# Altium PCB stm32-synthesizer_Board.PcbDoc
Units mm, origin at the board's own origin, x right, y up, seen from the top; angles counter-clockwise.
Board outline 100 x 82.5 mm, 2 copper layers (Top Layer, Bottom Layer); 81 components, 66 nets, 294 pads, 211 vias.
Unrouted connection lines stored in the file: 1.
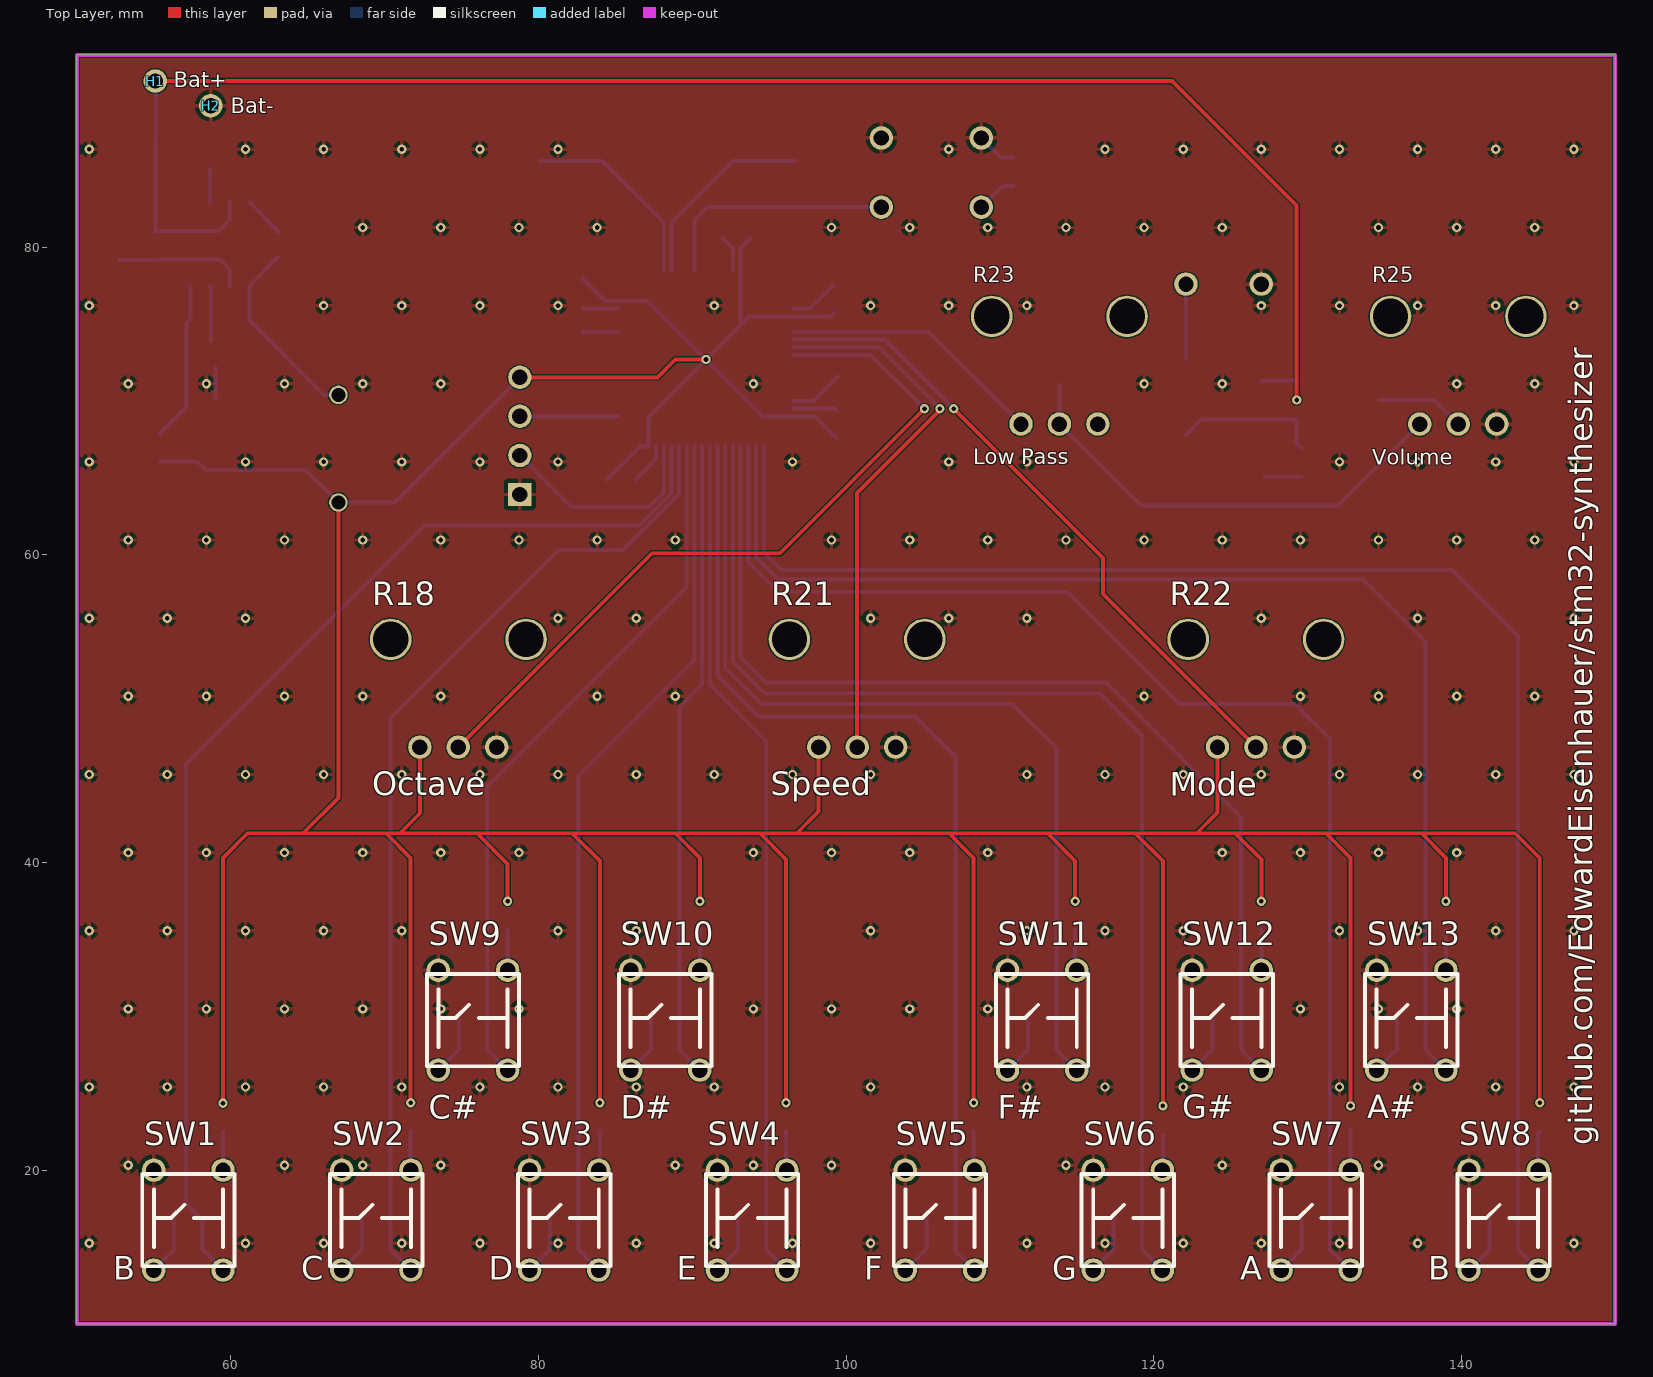
[diagram p0: Top Layer view]
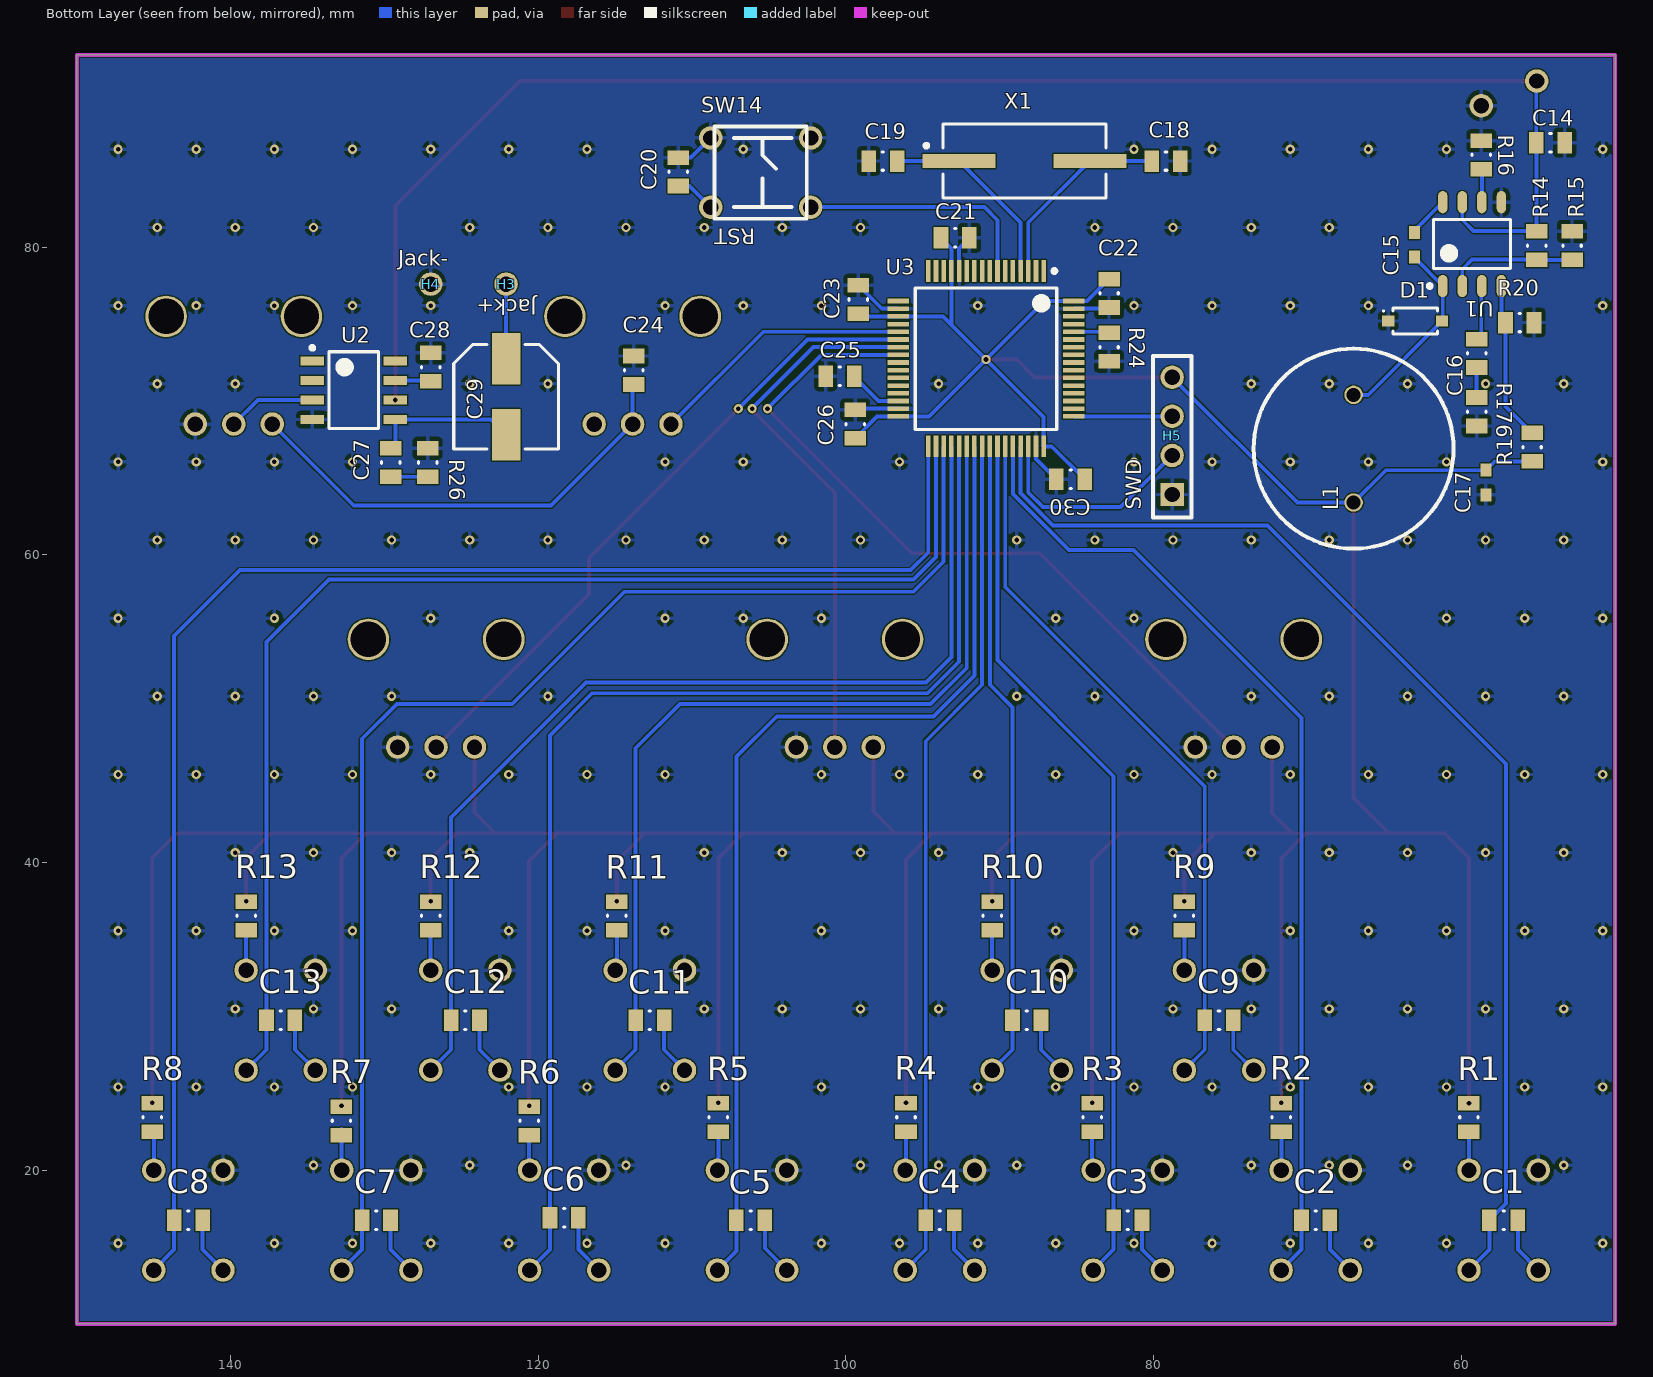
[diagram p1: Bottom Layer view, seen from below]

## Layer stack, top to bottom
Top Solder: solder mask 0.0102, Solder Resist, Dk 3.5
Top Layer: signal copper 0.0356
Dielectric 1: dielectric 0.32, FR-4, Dk 4.8
Bottom Layer: signal copper 0.0356
Bottom Solder: solder mask 0.0102, Solder Resist, Dk 3.5

## Board outline
50,92.5 150,92.5 150,10 50,10

## Design rules (kind name [scope] priority, off if disabled: settings)
Clearance [All] p1: gap=0.076 ignorepadtopadclearanceinfootprint=FALSE except(0.127: Arc-Arc Arc-Track Track-Track)
PolygonConnect [All] p1: connectstyle=Relief reliefconductorwidth=0.254 reliefentries=4 polygonreliefangle="90 Angle" airgapwidth=0.254
RoutingVias [All] p1: holewidth=0.711 width=1.27 viastyle="Through Hole" minholewidth=0.711 minwidth=1.27 maxholewidth=0.711 maxwidth=1.27
SolderMaskExpansion [All] p1: expansion=0.102
Width [All] p1: maxlimit=0.254 minlimit=0.127 preferedwidth=0.254
30 further rules are at their usual default settings.

## Components (designator, comment, footprint, x,y, rotation, side; value= is the part's Value field where it differs from the comment)
C1 "100nF" CRCW0805 57.25,16.75 r0 bottom
C2 "100nF" CRCW0805 69.464,16.75 r0 bottom
C3 "100nF" CRCW0805 81.679,16.75 r0 bottom
C4 "100nF" CRCW0805 93.893,16.75 r0 bottom
C5 "100nF" CRCW0805 106.2,16.75 r0 bottom
C6 "100nF" CRCW0805 118.321,16.9 r0 bottom
C7 "100nF" CRCW0805 130.536,16.75 r0 bottom
C8 "100nF" CRCW0805 142.75,16.75 r0 bottom
C9 "100nF" CRCW0805 75.75,29.75 r0 bottom
C10 "100nF" CRCW0805 88.25,29.75 r0 bottom
C11 "100nF" CRCW0805 112.75,29.75 r0 bottom
C12 "100nF" CRCW0805 124.75,29.75 r0 bottom
C13 "100nF" CRCW0805 136.75,29.75 r0 bottom
C14 "10uF" CRCW0805 54.2,86.8 r180 bottom
C15 "100nF" GRM188 63.05,80.15 r270 bottom
C16 "100pF" CRCW0805 59,73.1 r90 bottom
C17 "100nF" GRM188 58.4,64.7 r270 bottom
C18 "4.3pF" CRCW0805 79.2,85.6 r180 bottom
C19 "4.3pF" CRCW0805 97.6,85.6 r0 bottom
C20 "100nF" CRCW0805 110.9,84.9 r270 bottom
C21 "100nF" CRCW0805 92.9,80.6 r180 bottom
C22 "100nF" CRCW0805 82.9,77 r270 bottom
C23 "100nF" CRCW0805 99.2,76.6 r90 bottom
C24 "470nF" CRCW0805 113.8,72 r270 bottom
C25 "4.7uF" CRCW0805 100.4,71.6 r180 bottom
C26 "100nF" CRCW0805 99.4,68.5 r90 bottom
C27 "50nF" CRCW0805 129.6,66 r270 bottom
C28 "N/A" CRCW0805 127,72.2 r90 bottom
C29 "220uF" CAPAE6766X81M 122.1,70.275 r270 bottom
C30 "100nF" CRCW0805 85.4,64.9 r0 bottom
D1 "Diode" DIODES-INCORPORATED_1N5819 63,75.2 r180 bottom
H1 "Bat+" "HOLE 1MM" 55.1,90.8 r270 top
H2 "Bat-" "HOLE 1MM" 58.7,89.2 r0 top
H3 "Jack+" "Hole 1mm" 122.1,77.6 r90 bottom
H4 "Jack-" "Hole 1mm" 127,77.6 r90 bottom
H5 "SWD" M20-97704 78.8,63.92 r90 bottom
L1 "21.5uH" "COIL 0.7MM D=7MM" 67,70.4 r270 bottom
R1 "100k" CRCW0805 59.5,23.425 r90 bottom
R2 "100k" CRCW0805 71.7,23.425 r90 bottom
R3 "100k" CRCW0805 84,23.425 r90 bottom
R4 "100k" CRCW0805 96.1,23.425 r90 bottom
R5 "100k" CRCW0805 108.3,23.425 r90 bottom
R6 "100k" CRCW0805 120.6,23.2 r90 bottom
R7 "100k" CRCW0805 132.8,23.2 r90 bottom
R8 "100k" CRCW0805 145.1,23.425 r90 bottom
R9 "100k" CRCW0805 78,36.525 r90 bottom
R10 "100k" CRCW0805 90.5,36.525 r90 bottom
R11 "100k" CRCW0805 114.9,36.525 r90 bottom
R12 "100k" CRCW0805 127,36.525 r90 bottom
R13 "100k" CRCW0805 139,36.525 r90 bottom
R14 "100k" CRCW0805 55.1,80.1 r90 bottom
R15 "" CRCW0805 52.8,80.1 r270 bottom
R16 "200k" CRCW0805 58.7,86 r270 bottom
R17 "105k" CRCW0805 59,69.3 r90 bottom
R18 "Octave" RK09K113 72.3,47.5 r0 top
R19 "127k" CRCW0805 55.4,67 r270 bottom
R20 "40k2" CRCW0805 56.2,75.1 r0 bottom
R21 "Speed" RK09K113 98.225,47.5 r0 top
R22 "Mode" RK09K113 124.15,47.5 r0 top
R23 "Low Pass" RK09K113 111.375,68.5 r0 top
R24 "10k" CRCW0805 82.9,73.5 r270 bottom
R25 "Volume" RK09K113 137.3,68.5 r0 top
R26 "10" CRCW0805 127.2,66 r270 bottom
SW1 "B" ? 55,20 r0 top
SW2 "C" ? 67.214,20 r0 top
SW3 "D" ? 79.429,20 r0 top
SW4 "E" ? 91.643,20 r0 top
SW5 "F" ? 103.857,20 r0 top
SW6 "G" ? 116.071,20 r0 top
SW7 "A" ? 128.286,20 r0 top
SW8 "B" ? 140.5,20 r0 top
SW9 "C#" ? 73.5,33 r0 top
SW10 "D#" ? 86,33 r0 top
SW11 "F#" ? 110.5,33 r0 top
SW12 "G#" ? 122.5,33 r0 top
SW13 "A#" ? 134.5,33 r0 top
SW14 "RST" ? 102.3,87.1 r270 bottom
U1 "MP1584" SOIC127P600X175-8N 59.3,80.2 r90 bottom
U2 "LM386" "LM358 SOIC" 132,70.7 r180 bottom
U3 "STM32F410/LQFP64" STM32F410/LQFP64 90.9,72.75 r270 bottom
X1 "OSC" SODFL1230X430-2N 88.4,85.6 r180 bottom

## Footprints (in the part's own frame and the unit in brackets; to place one, negate y for a bottom-side part, rotate by r counter-clockwise, add the part's x,y. Pads: shape width x height; smd on the part's side, far side on the other; paste and mask are expansions set on the pad)
CAPAE6766X81M [mm] "Aluminum Electrolytic Capacitor, Body 6,60x6,60x8,10mm, IPC Low Density"
  rect 3.35x1.85 smd: 1(-2.475,0) 2(2.475,0)
  silkscreen extent -3.4,-3.4 3.4,3.4, body extent -3.4,-3.4 3.4,3.4, height 8.1
"COIL 0.7MM D=7MM" [mm]
  round 1.2 hole 0.9: 1(0,0) 2(7,0)
  silkscreen extent -3,-6.5 10,6.5
CRCW0805 [mm] "Chip Resistor, 2-Leads, Body 2,00x1,25mm, IPC Medium Density"
  rect 0.95x1.4 smd: 1(-0.925,0) 2(0.925,0)
  silkscreen extent -0.05,-0.6 0.05,0.6, body extent -1.05,-0.7 1.05,0.7, height 0.6
DIODES-INCORPORATED_1N5819 [mm] "SODFL, 2-Leads, Body 1,55x3,70mm, IPC Medium Density"
  rect 0.8x0.7 smd: 1(-1.75,0) 2(1.75,0)
  silkscreen extent -2.1,-0.85 1.45,0.85, body extent -1.42,-0.85 1.43,0.85, height 1.35
GRM188 [mm] "Chip Capacitor, 2-Leads, Body 1,60x0,80mm, IPC Medium Density"
  rect 0.85x0.7 smd: 1(-0.8,0) 2(0.8,0)
  body extent -0.8,-0.4 0.8,0.4, height 0.8
"HOLE 1MM" [mil]
  round 60 hole 39.37: 1(0,0)
"Hole 1mm" [mil]
  round 60 hole 39.37: 1(0,0)
"LM358 SOIC" [mm] "SOIC, 8-Leads, Body 4,90x3,90mm, Pitch 1,27mm, IPC Medium Density"
  rect 1.55x0.6 smd: 1(-2.7,1.905) 2(-2.7,0.635) 3(-2.7,-0.635) 4(-2.7,-1.905) 5(2.7,-1.905) 6(2.7,-0.635) 7(2.7,0.635) 8(2.7,1.905)
  silkscreen extent -2.83,-2.5 1.6,2.88, body extent -2,-2.5 2,2.5, height 1.75
M20-97704 [mil] "4x1mm holes 2.54mm pitch"
  rect 60x60 hole 39.37: 1(0,0)
  round 60 hole 39.37: 2(100,0) 3(200,0) 4(300,0)
  silkscreen extent -59,-49 354,49
RK09K113 [mm]
  round 1.524 hole 1: 1(0,0) 2(2.5,0) 3(5,0)
  round 2.7 hole 2.3: ""(-1.9,7) ""(6.9,7)
SODFL1230X430-2N [mm] "SODFL, 2-Leads, Body 4,83x12,30mm, IPC Medium Density"
  rect 4.75x0.9 smd: 1(-4.25,0) 2(4.25,0)
  silkscreen extent -6.5,-2.4 5.3,2.4, body extent -5.3,-2.41 5.3,2.41, height 4.3
SOIC127P600X175-8N [mm] "SOIC, 8-Leads, Body 4,90x3,90mm, Pitch 1,27mm, IPC Medium Density"
  oval 1.45x0.6 smd: 1(-2.725,1.905) 2(-2.725,0.635) 3(-2.725,-0.635) 4(-2.725,-1.905) 5(2.725,-1.905) 6(2.725,-0.635) 7(2.725,0.635) 8(2.725,1.905)
  silkscreen extent -2.85,-2.5 1.6,2.88, body extent -2,-2.5 2,2.5, height 1.75
STM32F410/LQFP64 [mm] "TSQFP, 64-Leads, Body 10,00x10,00mm, Pitch 0,50mm, IPC Medium Density"
  rect 1.4x0.3 smd: 1(-5.7,3.75) 2(-5.7,3.25) 3(-5.7,2.75) 4(-5.7,2.25) 5(-5.7,1.75) 6(-5.7,1.25) 7(-5.7,0.75) 8(-5.7,0.25) 9(-5.7,-0.25) 10(-5.7,-0.75) 11(-5.7,-1.25) 12(-5.7,-1.75) 13(-5.7,-2.25) 14(-5.7,-2.75) 15(-5.7,-3.25) 16(-5.7,-3.75) 33(5.7,-3.75) 34(5.7,-3.25) 35(5.7,-2.75) 36(5.7,-2.25) 37(5.7,-1.75) 38(5.7,-1.25) 39(5.7,-0.75) 40(5.7,-0.25) 41(5.7,0.25) 42(5.7,0.75) 43(5.7,1.25) 44(5.7,1.75) 45(5.7,2.25) 46(5.7,2.75) 47(5.7,3.25) 48(5.7,3.75)
  rect 0.3x1.4 smd: 17(-3.75,-5.7) 18(-3.25,-5.7) 19(-2.75,-5.7) 20(-2.25,-5.7) 21(-1.75,-5.7) 22(-1.25,-5.7) 23(-0.75,-5.7) 24(-0.25,-5.7) 25(0.25,-5.7) 26(0.75,-5.7) 27(1.25,-5.7) 28(1.75,-5.7) 29(2.25,-5.7) 30(2.75,-5.7) 31(3.25,-5.7) 32(3.75,-5.7) 49(3.75,5.7) 50(3.25,5.7) 51(2.75,5.7) 52(2.25,5.7) 53(1.75,5.7) 54(1.25,5.7) 55(0.75,5.7) 56(0.25,5.7) 57(-0.25,5.7) 58(-0.75,5.7) 59(-1.25,5.7) 60(-1.75,5.7) 61(-2.25,5.7) 62(-2.75,5.7) 63(-3.25,5.7) 64(-3.75,5.7)
  silkscreen extent -5.82,-4.6 4.6,4.6, body extent -5,-5 5,5, height 1.6
? [mm] "Tactical Switch 6x6mm"
  round 1.524 hole 1: 1(0,0) 2(0,-6.5) 3(4.5,0) 4(4.5,-6.5)
  silkscreen extent -0.75,-6.25 5.25,-0.25

## Part data
C1 C2 C3 C4 C5 C6 C7 C8 C9 C10 C11 C12 C13 C14 C15 C16 C17 C18 C19 C20 C21 C22 C23 C24 C25 C26 C27 C28 C30: library part Capacitor
  C1 C2 C3 C4 C5 C6 C7 C8 C9 C10 C11 C12 C13 C15 C17 C20 C21 C22 C23 C26 C30: Capacitance=100nF
  C14: Capacitance=10uF
  C16: Capacitance=100pF
  C18 C19: Capacitance=4.3pF
  C24: Capacitance=470nF
  C25: Capacitance=4.7uF
  C27: Capacitance=50nF
  C28: Capacitance=N/A
C29: library part Capacitor_Polarized, Capacitance=220uF
H1 H2 H3 H4: library part "Cable Hole"
H5: library part Header4
L1: library part Coil, Inductance=21.5uH
R1 R2 R3 R4 R5 R6 R7 R8 R9 R10 R11 R12 R13 R14 R15 R16 R17 R19 R20 R24 R26: library part Resitor
  R1 R2 R3 R4 R5 R6 R7 R8 R9 R10 R11 R12 R13 R14: Resistance=100k
  R16: Resistance=200k
  R17: Resistance=105k
  R19: Resistance=127k
  R20: Resistance=40k2
  R24: Resistance=10k
  R26: Resistance=10
R18 R21 R22 R23 R25: library part Potentiometer, Resistance=10k
SW1 SW2 SW3 SW4 SW5 SW6 SW7 SW8 SW9 SW10 SW11 SW12 SW13 SW14: library part Button
U2: "Low Voltage Audio Power Amplifier"
X1: library part Oscillator, Frequency=32M

## Free pads (board coordinates)
  round 0.6 hole 0.3: 1(59.5,24.35) 1(71.7,24.375) 1(78,37.475) 1(84,24.375) 1(90.5,37.475) 1(90.9,72.7) 1(96.1,24.375) 1(105.1,69.5) 1(106.1,69.5) 1(107,69.5) 1(108.3,24.375) 1(114.9,37.475) 1(120.6,24.175) 1(127,37.475) 1(132.8,24.175) 1(139,37.475) 1(145.1,24.375)

## Via types
v1: diameter 0.6, hole 0.3, Top Layer to Bottom Layer, tented both sides, 211 vias

## Nets (pads, with @x,y where several pads share a name; then routed paths per layer and width w, separated by ;. In a path a pad name is that pad's centre, name@x,y a point inside that pad or via, vN(x,y) a via of type N, cw(c..) or ccw(c..) an arc to the next point about the centre after c; other vN are vias at no path point)
+3V3: C17.1 C21.1 C22.1 C23.1 C26.1 C30.1 H5.4 L1.2 pad.1@59.5,24.35 pad.1@71.7,24.375 pad.1@78,37.475 pad.1@84,24.375 pad.1@90.5,37.475 pad.1@90.9,72.7 pad.1@96.1,24.375 pad.1@108.3,24.375 pad.1@114.9,37.475 pad.1@120.6,24.175 pad.1@127,37.475 pad.1@132.8,24.175 pad.1@139,37.475 pad.1@145.1,24.375 R1.2 R2.2 R3.2 R4.2 R5.2 R6.2 R7.2 R8.2 R9.2 R10.2 R11.2 R12.2 R13.2 R18.1 R19.2 R21.1 R22.1 U3.13 U3.19 U3.32 U3.48 U3.64 | length 383
  Top Layer w0.254: pad.1@59.5,24.35 59.5,40.3 61.1,41.9 64.7,41.9 ; L1.2@67.2,63.2 L1.2 67,44.2 64.7,41.9 ; pad.1@71.7,24.375 71.7,40.3 70.1,41.9 ; R18.1 72.3,43.2 71,41.9 ; pad.1@78,37.475 78,39.9 76,41.9 ; H5.4 87.74,71.54 88.9,72.7 pad.1@90.9,72.7 ; pad.1@84,24.375 84,40.1 82.2,41.9 ; pad.1@90.5,37.475 90.5,40.3 88.9,41.9 ; pad.1@96.1,24.375 96.1,40.2 94.4,41.9 ; R21.1 98.225,43.325 96.8,41.9 ; pad.1@108.3,24.375 108.3,40.3 106.7,41.9 ; pad.1@114.9,37.475 114.9,40.1 113.1,41.9 ; pad.1@120.6,24.175 120.6,40.1 118.8,41.9 ; R22.1 124.15,43.25 122.8,41.9 ; pad.1@127,37.475 127,40.2 125.3,41.9 ; pad.1@132.8,24.175 132.8,40.3 131.2,41.9 ; pad.1@139,37.475 139,40.3 137.4,41.9 ; pad.1@145.1,24.375 145.1,40.3 143.5,41.9 137.4,41.9 ; 64.7,41.9 70.1,41.9 ; 70.1,41.9 71,41.9 ; 71,41.9 76,41.9 ; 76,41.9 82.2,41.9 ; 82.2,41.9 88.9,41.9 ; 88.9,41.9 94.4,41.9 ; 94.4,41.9 96.8,41.9 ; 96.8,41.9 106.7,41.9 ; 106.7,41.9 113.1,41.9 ; 113.1,41.9 118.8,41.9 ; 118.8,41.9 122.8,41.9 ; 122.8,41.9 125.3,41.9 ; 125.3,41.9 131.2,41.9 ; 131.2,41.9 137.4,41.9
  Bottom Layer w0.254: R19.2 57.825,66.075 C17.1 64.9,65.5 L1.2 70.66,63.4 H5.4 ; C22.1 84.325,76.5 U3.64 87.1,76.5 pad.1@90.9,72.7 ; C30.1 86.625,67.05 U3.48 87.15,68.95 pad.1@90.9,72.7 ; C21.1 93.15,79.925 U3.13 93.15,74.95 ; C23.1 99.025,75.5 U3.19 93.7,75.5 93.15,74.95 ; C26.1 97.975,69 U3.32 94.6,69 pad.1@90.9,72.7 ; pad.1@90.9,72.7 93.15,74.95
BAT: C14.1 H1.1 R14.2 U1.7 U2.6 | length 106.1
  Top Layer w0.254: H1.1 121.2,90.8 129.3,82.7 v1(129.3,70.065)
  Bottom Layer w0.254: R14.2 C14.1@55.1,86.8 ; C14.1@55.1,86.825 C14.1 55.125,90.775 H1.1 ; R14.2@55.3,81.05 59.2,81.05 59.935,81.785 U1.7
DAC_out: R23.1 U3.21 | length 17.3
  Bottom Layer w0.254: U3.21 105.375,74.5 R23.1
GND: C14.2 C17.2 C18.2 C19.2 C20.1 C21.2 C22.2 C23.2 C24.1 C25.1 C26.2 C28.2 C30.2 D1.1 H2.1 H4.1 H5.1 R15.1 R16.1 R17.1 R18.3 R20.1 R21.3 R22.3 R24.2 R25.3 R26.1 SW1.1 SW2.1 SW3.1 SW4.1 SW5.1 SW6.1 SW7.1 SW8.1 SW9.1 SW10.1 SW11.1 SW12.1 SW13.1 SW14.1 SW14.2 U1.5 U2.4 U3.12 U3.18 U3.31 U3.47 U3.63 | length 16.2
  Bottom Layer w0.254: C22.2 82.975,76 U3.63 ; C30.2 87.65,66.225 U3.47 U3.47@87.625,67.025 ; C21.2 92.65,79.925 U3.12 ; U3.31 99.325,69.5 C26.2 ; U3.18 97.675,76 C23.2 ; SW14.2 110.075,85.825 C20.1
  other v1: 50.8,15.24 60.96,15.24 66.04,15.24 71.12,15.24 76.2,15.24 81.28,15.24 86.36,15.24 91.44,15.24 96.52,15.24 101.6,15.24 111.76,15.24 116.84,15.24 121.92,15.24 127,15.24 132.08,15.24 137.16,15.24 147.32,15.24 53.34,20.32 63.5,20.32 68.58,20.32 73.66,20.32 88.9,20.32 93.98,20.32 99.06,20.32 114.3,20.32 124.46,20.32 134.62,20.32 50.8,25.4 55.88,25.4 60.96,25.4 66.04,25.4 71.12,25.4 76.2,25.4 81.28,25.4 86.36,25.4 91.44,25.4 101.6,25.4 111.76,25.4 116.84,25.4 121.92,25.4 132.08,25.4 137.16,25.4 142.24,25.4 147.32,25.4 53.34,30.48 58.42,30.48 63.5,30.48 68.58,30.48 73.66,30.48 78.74,30.48 93.98,30.48 99.06,30.48 104.14,30.48 109.22,30.48 129.54,30.48 134.62,30.48 139.7,30.48 50.8,35.56 55.88,35.56 60.96,35.56 66.04,35.56 71.12,35.56 81.28,35.56 86.36,35.56 101.6,35.56 111.76,35.56 116.84,35.56 121.92,35.56 132.08,35.56 137.16,35.56 142.24,35.56 147.32,35.56 53.34,40.64 58.42,40.64 63.5,40.64 68.58,40.64 73.66,40.64 78.74,40.64 93.98,40.64 99.06,40.64 104.14,40.64 109.22,40.64 124.46,40.64 129.54,40.64 134.62,40.64 139.7,40.64 50.8,45.72 55.88,45.72 60.96,45.72 66.04,45.72 71.12,45.72 76.2,45.72 81.28,45.72 86.36,45.72 91.44,45.72 96.52,45.72 101.6,45.72 111.76,45.72 116.84,45.72 121.92,45.72 127,45.72 132.08,45.72 137.16,45.72 142.24,45.72 147.32,45.72 53.34,50.8 58.42,50.8 63.5,50.8 68.58,50.8 73.66,50.8 83.82,50.8 88.9,50.8 119.38,50.8 129.54,50.8 134.62,50.8 139.7,50.8 144.78,50.8 50.8,55.88 55.88,55.88 60.96,55.88 81.28,55.88 86.36,55.88 101.6,55.88 106.68,55.88 111.76,55.88 127,55.88 137.16,55.88 147.32,55.88 53.34,60.96 58.42,60.96 63.5,60.96 68.58,60.96 73.66,60.96 78.74,60.96 83.82,60.96 88.9,60.96 99.06,60.96 104.14,60.96 109.22,60.96 114.3,60.96 119.38,60.96 124.46,60.96 129.54,60.96 134.62,60.96 139.7,60.96 144.78,60.96 50.8,66.04 60.96,66.04 66.04,66.04 71.12,66.04 76.2,66.04 81.28,66.04 96.52,66.04 106.68,66.04 111.76,66.04 132.08,66.04 137.16,66.04 142.24,66.04 147.32,66.04 53.34,71.12 58.42,71.12 63.5,71.12 68.58,71.12 73.66,71.12 93.98,71.12 119.38,71.12 124.46,71.12 139.7,71.12 144.78,71.12 50.8,76.2 66.04,76.2 71.12,76.2 76.2,76.2 81.28,76.2 91.44,76.2 101.6,76.2 106.68,76.2 111.76,76.2 127,76.2 132.08,76.2 137.16,76.2 142.24,76.2 147.32,76.2 68.58,81.28 73.66,81.28 78.74,81.28 83.82,81.28 99.06,81.28 104.14,81.28 109.22,81.28 114.3,81.28 119.38,81.28 124.46,81.28 134.62,81.28 139.7,81.28 144.78,81.28 50.8,86.36 60.96,86.36 66.04,86.36 71.12,86.36 76.2,86.36 81.28,86.36 106.68,86.36 116.84,86.36 121.92,86.36 127,86.36 132.08,86.36 137.16,86.36 142.24,86.36 147.32,86.36
Key_A: C7.2 SW7.4 U3.35 | length 85.2
  Bottom Layer w0.254: U3.35 93.65,59.55 95.6,57.6 114.4,57.6 121.7,50.3 129.2,50.3 131.461,48.039 C7.2 131.461,14.825 SW7.4
Key_A#: C13.2 SW13.4 U3.34 | length 81.4
  Bottom Layer w0.254: U3.34 94.15,59.85 95.6,58.4 133.6,58.4 137.675,54.325 C13.2 137.675,27.825 SW13.4
Key_B: C8.2 SW8.4 U3.33 | length 99.9
  Bottom Layer w0.254: U3.33 94.65,60.15 95.8,59 139.4,59 143.675,54.725 C8.2 143.675,14.825 SW8.4
Key_B0: C1.2 SW1.4 U3.45 | length 75.8
  Bottom Layer w0.254: SW1.4 58.175,14.825 C1.2 57.1,17.825 57.1,46.4 72.6,61.9 86.539,61.9 88.65,64.011 U3.45
Key_C: C2.2 SW2.4 U3.44 | length 64.3
  Bottom Layer w0.254: SW2.4 70.389,14.825 C2.2 70.389,49.389 81.3,60.3 85.5,60.3 89.15,63.95 U3.44
Key_C#: C9.2 SW9.4 U3.43 | length 46.5
  Bottom Layer w0.254: SW9.4 76.675,27.825 C9.2 76.675,44.945 89.65,57.92 U3.43
Key_D: C3.2 SW3.4 U3.42 | length 57.2
  Bottom Layer w0.254: SW3.4 82.604,14.825 C3.2 82.604,45.604 90.15,53.15 U3.42
Key_D#: C10.2 SW10.4 U3.41 | length 41.7
  Bottom Layer w0.254: SW10.4 89.175,27.825 C10.2 89.175,50.075 90.65,51.55 U3.41
Key_E: C4.2 SW4.4 U3.40 | length 55.6
  Bottom Layer w0.254: U3.40 91.15,51.55 94.818,47.882 C4.2 94.818,14.825 SW4.4
Key_F: C5.2 SW5.4 U3.39 | length 66.4
  Bottom Layer w0.254: U3.39 91.65,52.15 94.3,49.5 104.5,49.5 107.125,46.875 C5.2 107.125,14.732 SW5.4
Key_F#: C11.2 SW11.4 U3.38 | length 59.6
  Bottom Layer w0.254: U3.38 92.15,52.65 94.5,50.3 110.8,50.3 113.675,47.425 C11.2 113.675,27.825 SW11.4
Key_G: C6.2 SW6.4 U3.37 | length 77.9
  Bottom Layer w0.254: U3.37 92.65,53.05 94.7,51 116.5,51 119.246,48.254 C6.2 119.246,14.825 SW6.4
Key_G#: C12.2 SW12.4 U3.36 | length 67.5
  Bottom Layer w0.254: U3.36 93.15,53.35 94.8,51.7 116.9,51.7 125.675,42.925 C12.2 125.675,27.825 SW12.4
Mode: pad.1@107,69.5 R22.2 U3.22 | length 42.4
  Top Layer w0.254: pad.1@107,69.5 116.7,59.8 116.7,57.45 R22.2
  Bottom Layer w0.254: U3.22 102.5,74 pad.1@107,69.5
NetC1_1: C1.1 SW1.2 | length 3.8
  Bottom Layer w0.254: SW1.2 56.325,14.825 C1.1
NetC2_1: C2.1 SW2.2 | length 3.8
  Bottom Layer w0.254: SW2.2 68.539,14.825 C2.1
NetC3_1: C3.1 SW3.2 | length 3.8
  Bottom Layer w0.254: SW3.2 80.754,14.825 C3.1
NetC4_1: C4.1 SW4.2 | length 3.8
  Bottom Layer w0.254: SW4.2 92.968,14.825 C4.1
NetC5_1: C5.1 SW5.2 | length 3.8
  Bottom Layer w0.254: SW5.2 105.275,14.918 C5.1
NetC6_1: C6.1 SW6.2 | length 3.9
  Bottom Layer w0.254: SW6.2 117.396,14.825 C6.1
NetC7_1: C7.1 SW7.2 | length 3.8
  Bottom Layer w0.254: SW7.2 129.611,14.825 C7.1
NetC8_1: C8.1 SW8.2 | length 3.8
  Bottom Layer w0.254: SW8.2 141.825,14.825 C8.1
NetC9_1: C9.1 SW9.2 | length 3.8
  Bottom Layer w0.254: SW9.2 74.825,27.825 C9.1
NetC10_1: C10.1 SW10.2 | length 3.8
  Bottom Layer w0.254: SW10.2 87.325,27.825 C10.1
NetC11_1: C11.1 SW11.2 | length 3.8
  Bottom Layer w0.254: SW11.2 111.825,27.825 C11.1
NetC12_1: C12.1 SW12.2 | length 3.8
  Bottom Layer w0.254: SW12.2 123.825,27.825 C12.1
NetC13_1: C13.1 SW13.2 | length 3.8
  Bottom Layer w0.254: SW13.2 135.825,27.825 C13.1
NetC15_1: C15.1 U1.8 | length 2.7
  Bottom Layer w0.254: U1.8 63.05,81.08 C15.1
NetC15_2: C15.2 D1.2 L1.1 U1.1 | length 12.7
  Bottom Layer w0.254: C15.2 63.05,79.32 U1.1 61.205,75.245 D1.2 66.05,70.4 L1.1
NetC16_1: C16.1 R17.2 | length 2
  Bottom Layer w0.254: R17.2 C16.1
NetC16_2: C16.2 U1.3 | length 3.6
  Bottom Layer w0.254: U1.3 58.7,77.44 C16.2@58.7,73.9
NetC18_1: C18.1 U3.3 X1.2 | length 12.8
  Bottom Layer w0.254: C18.1 X1.2 88.15,81.6 U3.3
NetC19_1: C19.1 U3.4 X1.1 | length 12.8
  Bottom Layer w0.254: U3.4 88.65,81.6 X1.1 C19.1
NetC20_2: C20.2 SW14.3 SW14.4 U3.7 | length 18.5
  Bottom Layer w0.254: U3.7 90.15,81.75 91,82.6 SW14.3 ; SW14.4 110.175,83.975 C20.2
NetC24_2: C24.2 R23.2 R25.1 | length 30.4
  Bottom Layer w0.254: C24.2 113.875,71 R23.2 119.175,63.2 132,63.2 R25.1
NetC25_2: C25.2 U3.30 | length 3.5
  Bottom Layer w0.254: U3.30 97.875,70 C25.2
NetC27_1: C27.1 C29.2 U2.5 | length 9.6
  Bottom Layer w0.254: C29.2 123.095,68.795 U2.5 129.3,67.225 C27.1
NetC27_2: C27.2 R26.2 | length 2.4
  Bottom Layer w0.254: R26.2 C27.2
NetC28_1: C28.1 U2.7 | length 2.3
  Bottom Layer w0.254: C28.1 127.06,71.335 U2.7
NetC29_1: C29.1 H3.1 | length 4.9
  Bottom Layer w0.254: C29.1 H3.1
NetH5_2: H5.2 U3.46 | length 14.1
  Bottom Layer w0.254: H5.2 82.16,63.1 87.2,63.1 88.15,64.05 U3.46
NetH5_3: H5.3 U3.49 | length 6.4
  Bottom Layer w0.254: H5.3 U3.49
NetR1_1: R1.1 SW1.3 | length 2.5
  Bottom Layer w0.254: SW1.3 R1.1
NetR2_1: R2.1 SW2.3 | length 2.5
  Bottom Layer w0.254: R2.1 71.7,20.014 SW2.3
NetR3_1: R3.1 SW3.3 | length 2.5
  Bottom Layer w0.254: SW3.3 84,20.071 R3.1
NetR4_1: R4.1 SW4.3 | length 2.5
  Bottom Layer w0.254: R4.1 96.1,20.043 SW4.3
NetR5_1: R5.1 SW5.3 | length 2.5
  Bottom Layer w0.254: R5.1 108.3,20.057 SW5.3
NetR6_1: R6.1 SW6.3 | length 2.3
  Bottom Layer w0.254: SW6.3 120.6,20.029 R6.1
NetR7_1: R7.1 SW7.3 | length 2.7
  Bottom Layer w0.254: SW7.3 132.786,22.661 R7.1@132.8,22.675
NetR8_1: R8.1 SW8.3 | length 2.5
  Bottom Layer w0.254: SW8.3 145,22.4 R8.1
NetR9_1: R9.1 SW9.3 | length 2.6
  Bottom Layer w0.254: SW9.3 R9.1
NetR10_1: R10.1 SW10.3 | length 2.6
  Bottom Layer w0.254: SW10.3 R10.1
NetR11_1: R11.1 SW11.3 | length 2.6
  Bottom Layer w0.254: R11.1 114.9,33.1 SW11.3
NetR12_1: R12.1 SW12.3 | length 2.6
  Bottom Layer w0.254: SW12.3 R12.1
NetR13_1: R13.1 SW13.3 | length 2.6
  Bottom Layer w0.254: SW13.3 R13.1
NetR14_1: R14.1 R15.2 U1.2 | length 8.3
  Bottom Layer w0.254: R15.2 R14.1 ; R14.1@55.3,79.2 59.3,79.2 59.935,78.565 U1.2
NetR16_2: R16.2 U1.6 | length 2.2
  Bottom Layer w0.254: U1.6 58.665,85.04 R16.2
NetR19_1: R19.1 R20.2 U1.4 | length 10.4
  Bottom Layer w0.254: R19.1 57.125,69.65 R20.2 57.395,75.37 U1.4
NetR24_1: R24.1 U3.60 | length 2.3
  Bottom Layer w0.254: R24.1 82.975,74.5 U3.60
NetR25_2: R25.2 U2.3 | length 5.8
  Bottom Layer w0.254: U2.3 138.235,70.065 R25.2 R25.2@139.835,68.465
Octave: pad.1@105.1,69.5 R18.2 U3.24 | length 49.2
  Top Layer w0.254: R18.2 87.4,60.1 95.7,60.1 pad.1@105,69.4
  Bottom Layer w0.254: U3.24 101.6,73 pad.1@105.1,69.5
Speed: pad.1@106.1,69.5 R21.2 U3.23 | length 35.1
  Top Layer w0.254: R21.2 100.725,64.025 pad.1@105.95,69.25
  Bottom Layer w0.254: U3.23 102.1,73.5 pad.1@106.1,69.5
pads on no net: R18. R21. R22. R23. R23.3 R25. U2.1 U2.2 U2.8 U3.1 U3.2 U3.5 U3.6 U3.8 U3.9 U3.10 U3.11 U3.14 U3.15 U3.16 U3.17 U3.20 U3.25 U3.26 U3.27 U3.28 U3.29 U3.50 U3.51 U3.52 U3.53 U3.54 U3.55 U3.56 U3.57 U3.58 U3.59 U3.61 U3.62

## Polygon pours and split planes (outlines as drawn)
GND on Bottom Layer "Bottom Layer-No Net" (solid, pour order 0): 50,10 50,92.5 150,92.5 150,10
GND on Top Layer "Bottom Layer-No Net" (solid, pour order 2): 50,10 50,92.5 150,92.5 150,10

## Keep-outs
Keep-Out Layer:
  the board outline again, w0.254

## Silkscreen, mask and mechanical layers (free items; w line width, h text height)
Top Overlay:
  text "github.com/EdwardEisenhauer/stm32-synthesizer" at 148.5,21.6 h1.52 r90